# EAGLE board CampLight (EAGLE 6.5.0)
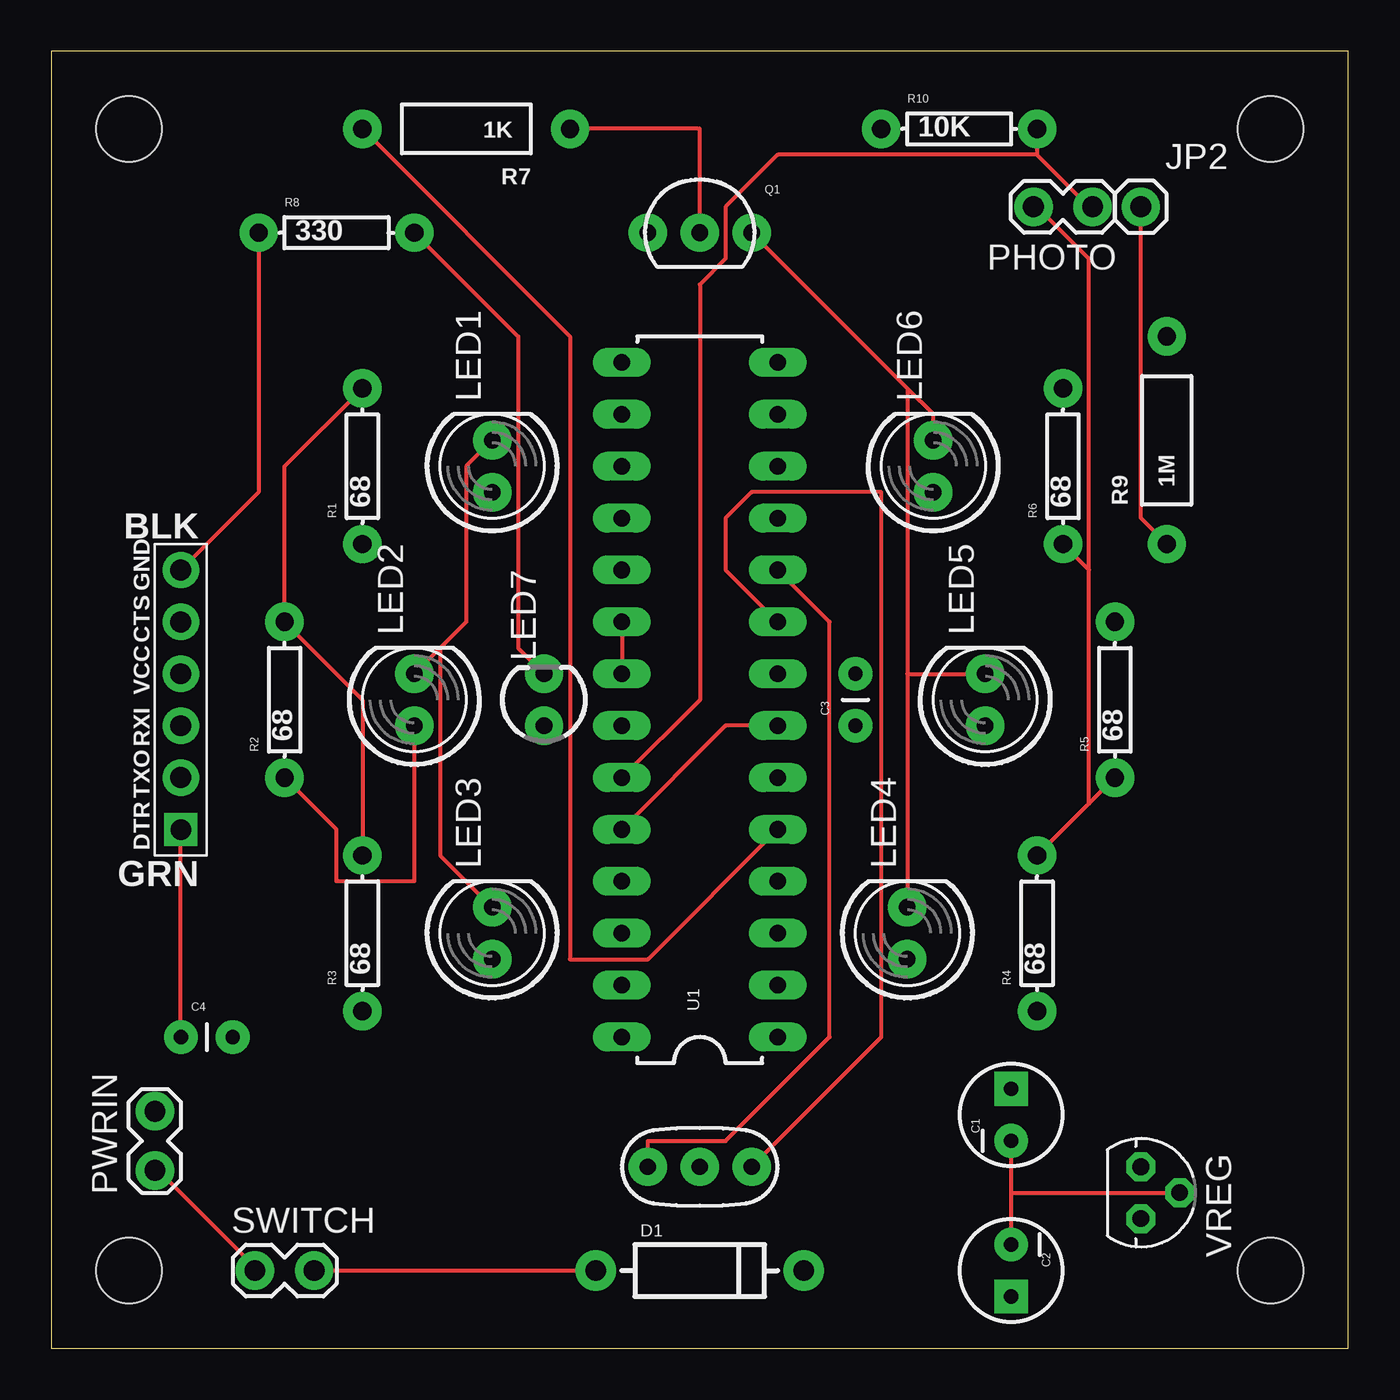
[diagram p0: board, top side]
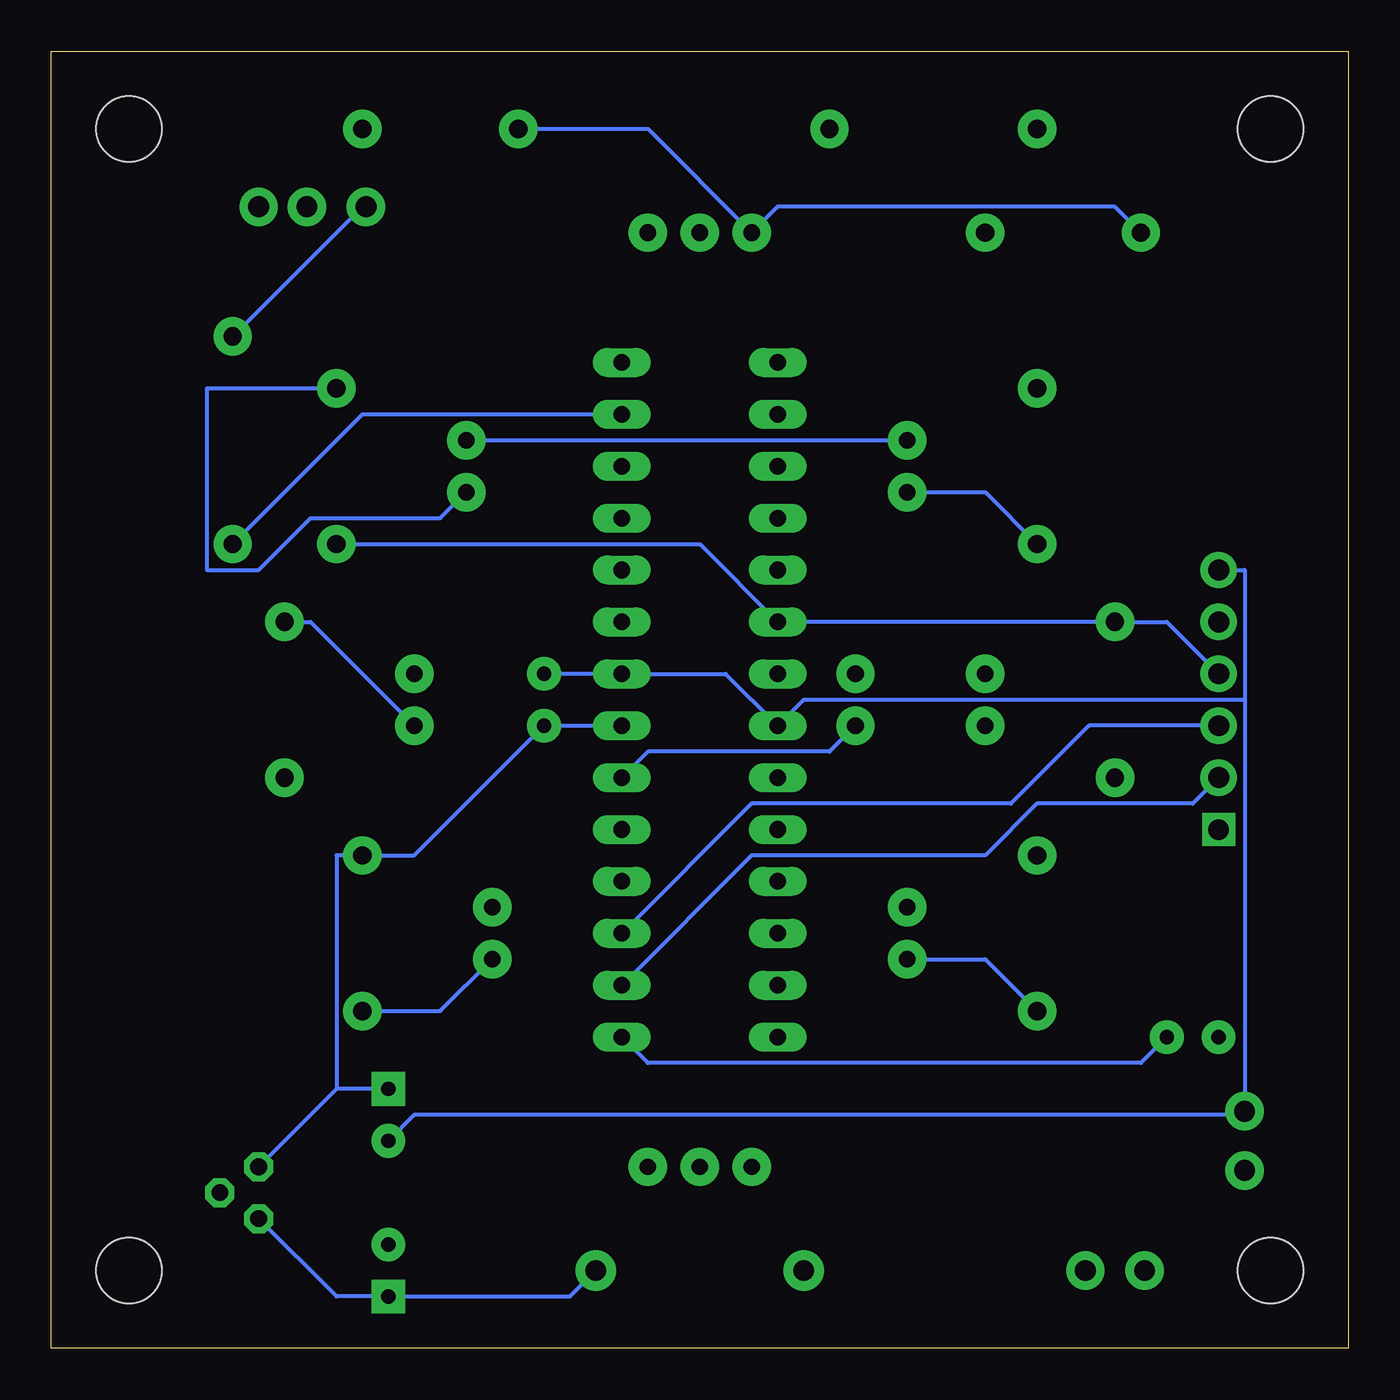
[diagram p1: board, bottom side, seen from below]

Size 63.5 x 63.5 mm. Coordinates in mm from the lower left corner, seen from the top.
Outline: 0,0 63.5,0 63.5,63.5 0,63.5 0,0
Copper layers (1*16): Top 0.035mm / dielectric 1.5mm / Bottom 0.035mm
Design rules "SparkFun": minimum track width 8mil, minimum drill 20mil, track to track 8mil, track to pad 8mil, pad to pad 8mil, via to via 8mil, smd to smd 8mil, copper to edge 10mil, drill to drill 8mil, minimum pad ring 12mil, minimum via ring 10mil, stop-mask expansion 4mil, vias tented up to drill 25mil, thermal gap 10mil
Holes 3.2 mm at 3.81,59.69 59.69,59.69 59.69,3.81 3.81,3.81

## Footprints (pad centres in the part's own frame; a part is rotated, then mirrored left to right if it is on the bottom)
CPOL-RADIAL-10UF-25V = drill 0.7 pad 1.651 square: 1 1.27,0 | drill 0.7 pad 1.651: 2 -1.27,0
CAP-PTH-SMALL = drill 0.7 pad 1.651: 1 0,0; 2 2.54,0
DIODE-1N4001 = drill 1 pad 1.981: A -5.08,0; C 5.08,0
FTDI_DEVICE_SIDE = drill 1 square: P$1 -6.35,0 | drill 1.016 pad 1.778: P$2 -3.81,0; P$3 -1.27,0; P$4 1.27,0; P$5 3.81,0; P$6 6.35,0
1X01 = drill 1.016 pad 1.88: 1 0,0
LED5MM = drill 0.813 pad 1.88: A -1.27,0; K 1.27,0
LED3MM = drill 0.813 pad 1.88: A -1.27,0; K 1.27,0
1X02_LOCK = drill 1.016 pad 1.88: 1 -0.178,0; 2 2.718,0
TO-92-AMMO = drill 0.813 pad 1.88: 1 -2.54,0; 2 0,0; 3 2.54,0
AXIAL-0.3 = drill 0.9 pad 1.88: P$1 -3.81,0; P$2 3.81,0
AXIAL-0.4 = drill 0.9 pad 1.88: P$1 -5.08,0; P$2 5.08,0
DIL28-3 = drill 0.813 long: 1 -16.51,-3.81; 2 -13.97,-3.81; 3 -11.43,-3.81; 4 -8.89,-3.81; 5 -6.35,-3.81; 6 -3.81,-3.81; 7 -1.27,-3.81; 8 1.27,-3.81; 9 3.81,-3.81; 10 6.35,-3.81; 11 8.89,-3.81; 12 11.43,-3.81; 13 13.97,-3.81; 14 16.51,-3.81; 15 16.51,3.81; 16 13.97,3.81; 17 11.43,3.81; 18 8.89,3.81; 19 6.35,3.81; 20 3.81,3.81; 21 1.27,3.81; 22 -1.27,3.81; 23 -3.81,3.81; 24 -6.35,3.81; 25 -8.89,3.81; 26 -11.43,3.81; 27 -13.97,3.81; 28 -16.51,3.81
78LXX = drill 0.813 octagon: GND 0,1.905; IN 1.27,0; OUT -1.27,0
RESONATOR-PTH = drill 0.8 pad 1.88: 1 -2.54,0; 2 0,0; 3 2.54,0

## Placement (x,y rotation side)
C1  10uF  [CPOL-RADIAL-10UF-25V]  46.99,11.43 90 top
C2  100uF  [CPOL-RADIAL-10UF-25V]  46.99,3.81 270 top
C3  0.1mF  [CAP-PTH-SMALL]  39.37,30.48 90 top
C4  0.1mF  [CAP-PTH-SMALL]  6.35,15.24 0 top
D1  [DIODE-1N4001]  31.75,3.81 0 top
JP1  FTDI_DEVICE  [FTDI_DEVICE_SIDE]  6.35,31.75 90 top
JP2  TOUCH  [1X01]  53.34,55.88 0 top
LED1  [LED5MM]  21.59,43.18 90 top
LED2  [LED5MM]  17.78,31.75 90 top
LED3  [LED5MM]  21.59,20.32 90 top
LED4  [LED5MM]  41.91,20.32 90 top
LED5  [LED5MM]  45.72,31.75 90 top
LED6  [LED5MM]  43.18,43.18 90 top
LED7  [LED3MM]  24.13,31.75 90 top
PHOTO  [1X02_LOCK]  50.8,55.88 180 top
PWRIN  [1X02_LOCK]  5.08,8.89 90 top
Q1  [TO-92-AMMO]  31.75,54.61 0 top
R1  68  [AXIAL-0.3]  15.24,43.18 90 top
R2  68  [AXIAL-0.3]  11.43,31.75 90 top
R3  68  [AXIAL-0.3]  15.24,20.32 90 top
R4  68  [AXIAL-0.3]  48.26,20.32 90 top
R5  68  [AXIAL-0.3]  52.07,31.75 90 top
R6  68  [AXIAL-0.3]  49.53,43.18 90 top
R7  1K  [AXIAL-0.4]  20.32,59.69 180 top
R8  330  [AXIAL-0.3]  13.97,54.61 0 top
R9  1M  [AXIAL-0.4]  54.61,44.45 90 top
R10  10K  [AXIAL-0.3]  44.45,59.69 0 top
SWITCH  [1X02_LOCK]  10.16,3.81 0 top
U1  ATMEGA328P_PDIP  [DIL28-3]  31.75,31.75 90 top
VREG  [78LXX]  53.34,7.62 270 top
Y1  [RESONATOR-PTH]  31.75,8.89 180 top

## Library data of the parts
C1-C4 PHOTO PWRIN R7 R9 SWITCH = SparkFun-Passives
D1 Q1 = SparkFun-DiscreteSemi
JP1 JP2 = SparkFun-Connectors
LED1-LED7 = SparkFun-LED
R1-R6 R8 R10 = SparkFun-Resistors
U1 = SparkFun-DigitalIC
VREG = v-reg
Y1 = SparkFun-FreqCtrl

## Nets
5V: C1.1 C3.1 JP1.P$4 PHOTO.2 R1.P$2 R2.P$2 R3.P$2 R4.P$2 R5.P$1 R6.P$1 R9.P$2 U1.7 U1.20 U1.21 U1.24 VREG.OUT
GND: C1.2 C2.2 C3.2 JP1.P$6 PWRIN.2 Q1.1 R8.P$1 R10.P$1 U1.8 U1.22 VREG.GND
N$1: C2.1 D1.C VREG.IN
N$2: PWRIN.1 SWITCH.1
N$3: U1.9 Y1.1
N$4: U1.10 Y1.3
N$5: D1.A SWITCH.2
N$6: R7.P$2 U1.5
N$7: LED1.K LED2.K LED3.K LED4.K LED5.K LED6.K Q1.3
N$8: LED4.A R4.P$1
N$9: LED5.A R5.P$2
N$10: LED1.A R1.P$1
N$11: LED6.A R6.P$2
N$12: JP1.P$3 U1.3
N$13: LED2.A R2.P$1
N$14: LED3.A R3.P$1
N$15: JP1.P$2 U1.2
N$16: C4.2 U1.1
N$17: C4.1 JP1.P$1
N$18: Q1.2 R7.P$1
N$19: LED7.K R8.P$2
N$20: LED7.A U1.6
N$21: JP2.1 R9.P$1 U1.13
N$24: PHOTO.1 R10.P$2 U1.23

## Tracks (layer width: path | path; a pad name or v marks a point on that pad's centre or on a via)
5V
  Top 0.203: U1.20 U1.21 | R3.P$2 15.24,31.75 R2.P$2 11.43,43.18 R1.P$2 | R5.P$1 50.8,26.67 | 50.8,26.67 R4.P$2 | 50.8,38.1 R6.P$1 | 50.8,26.67 50.8,38.1 | 50.8,38.1 50.8,53.34 48.26,55.88 PHOTO.2 | U1.24 33.02,30.48 U1.7
  Bottom 0.203: R9.P$2 48.26,55.88 PHOTO.2 | 49.53,12.7 VREG.OUT | C1.1 49.53,12.7 | U1.7 C3.1 45.72,24.13 R4.P$2 49.53,24.13 49.53,12.7 | R6.P$1 31.75,39.37 U1.20 R2.P$2 8.89,35.56 JP1.P$4
GND
  Top 0.203: 46.99,7.62 VREG.GND | C1.2 46.99,7.62 | 46.99,7.62 C2.2 | JP1.P$6 10.16,41.91 R8.P$1
  Bottom 0.203: R10.P$1 34.29,59.69 Q1.1 27.94,55.88 11.43,55.88 R8.P$1 | C3.2 U1.8 30.48,33.02 U1.22 26.67,31.75 5.08,31.75 | 5.08,31.75 5.08,38.1 JP1.P$6 | 5.08,31.75 PWRIN.2 5.08,11.43 45.72,11.43 C1.2
N$1
  Bottom 0.203: VREG.IN 49.53,2.54 C2.1 38.1,2.54 D1.C
N$2
  Top 0.203: SWITCH.1 10.16,3.81 5.08,8.89 PWRIN.1
N$3
  Top 0.203: U1.9 33.02,38.1 33.02,40.64 34.29,41.91 40.64,41.91 40.64,15.24 Y1.1
N$4
  Top 0.203: U1.10 38.1,35.56 38.1,15.24 33.02,10.16 29.21,10.16 Y1.3
N$5
  Top 0.203: D1.A SWITCH.2 12.7,3.81
N$6
  Top 0.203: U1.5 29.21,19.05 25.4,19.05 25.4,49.53 R7.P$2
N$7
  Top 0.203: 19.05,34.29 20.32,35.56 20.32,43.18 LED1.K | 19.05,34.29 LED2.K | 41.91,46.99 43.18,45.72 LED6.K | 41.91,46.99 Q1.3 | 41.91,46.99 41.91,33.02 | 41.91,33.02 LED4.K | 41.91,33.02 LED5.K | LED3.K 19.05,24.13 19.05,34.29
  Bottom 0.203: LED6.K LED1.K
N$8
  Bottom 0.203: LED4.A 44.45,16.51 R4.P$1
N$9
  Bottom 0.203: LED5.A 50.8,35.56 R5.P$2
N$10
  Bottom 0.203: R1.P$1 17.78,41.91 LED1.A
N$11
  Bottom 0.203: LED6.A 44.45,40.64 50.8,40.64 53.34,38.1 55.88,38.1 55.88,46.99 R6.P$2
N$12
  Bottom 0.203: U1.3 29.21,26.67 16.51,26.67 12.7,30.48 JP1.P$3
N$13
  Top 0.203: R2.P$1 13.97,25.4 13.97,22.86 17.78,22.86 LED2.A
N$14
  Bottom 0.203: R3.P$1 17.78,19.05 LED3.A
N$15
  Bottom 0.203: U1.2 29.21,24.13 17.78,24.13 15.24,26.67 7.62,26.67 JP1.P$2
N$16
  Bottom 0.203: U1.1 34.29,13.97 10.16,13.97 C4.2
N$17
  Top 0.203: C4.1 JP1.P$1
N$18
  Top 0.203: R7.P$1 31.75,59.69 Q1.2
N$19
  Top 0.203: LED7.K 22.86,34.29 22.86,49.53 R8.P$2
N$20
  Bottom 0.203: U1.6 34.29,29.21 25.4,29.21 LED7.A
N$21
  Top 0.203: JP2.1 53.34,40.64 R9.P$1
  Bottom 0.203: U1.13 48.26,45.72 R9.P$1
N$24
  Top 0.203: U1.23 31.75,31.75 31.75,52.07 33.02,53.34 33.02,55.88 35.56,58.42 48.26,58.42 | R10.P$2 48.26,58.42 | 48.26,58.42 50.8,55.88 PHOTO.1